# Altium PCB MMA8652FCR1.PcbDoc
Units mm, origin at the board's own origin, x right, y up, seen from the top; angles counter-clockwise.
Board outline 42.93 x 21.46 mm, 2 copper layers (Top Layer, Bottom Layer); 9 components, 8 nets, 29 pads, 0 vias.
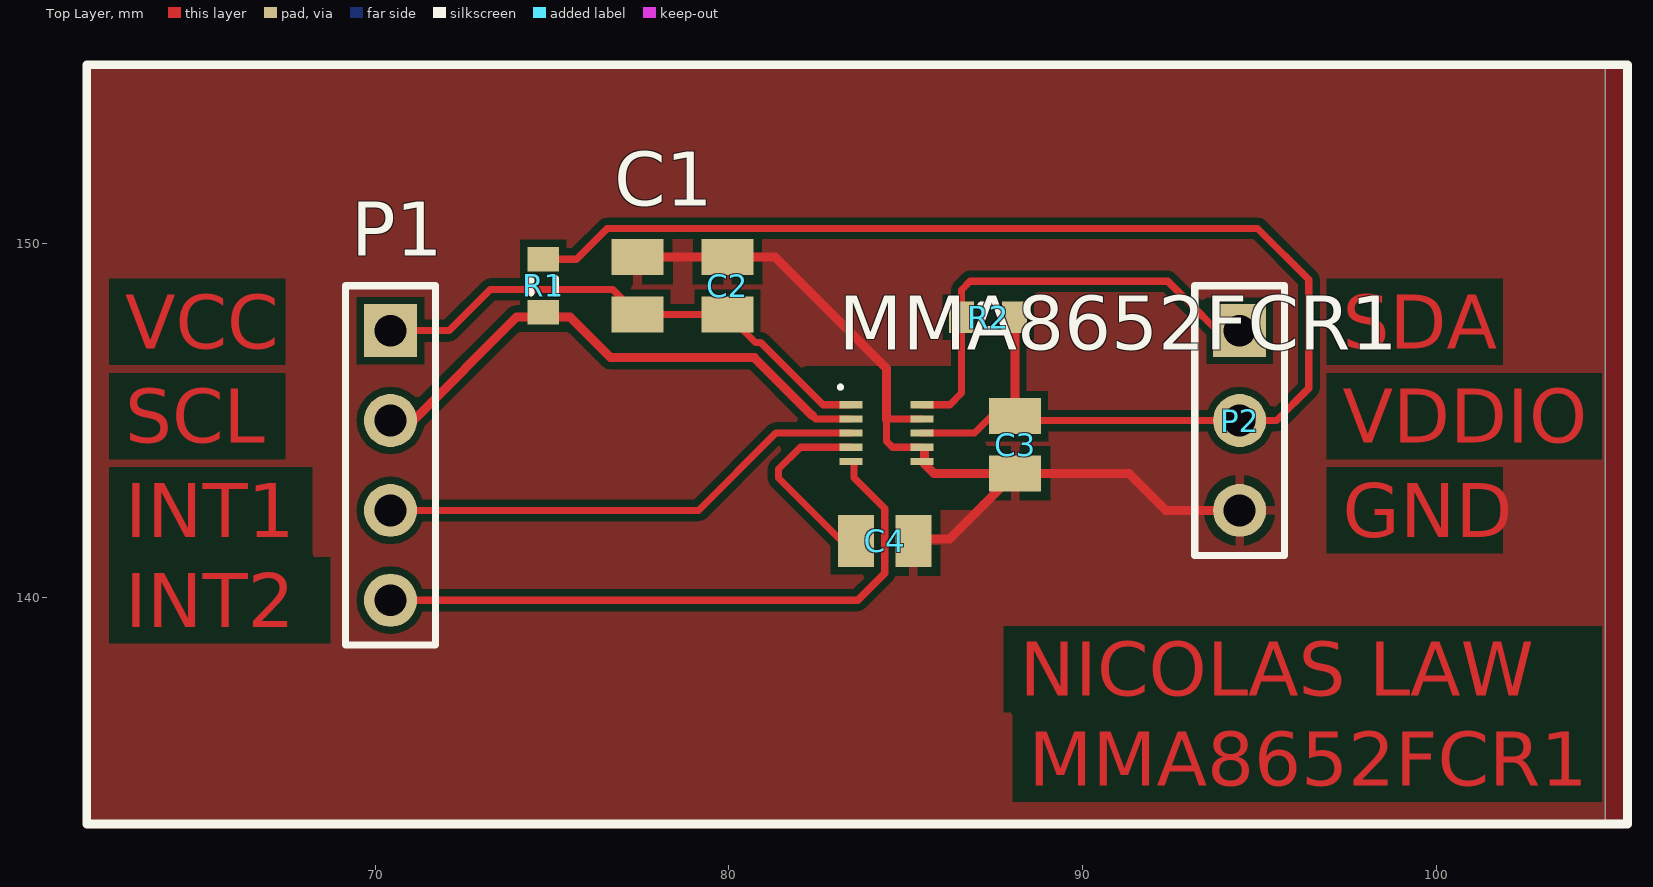
[diagram p0: Top Layer view]
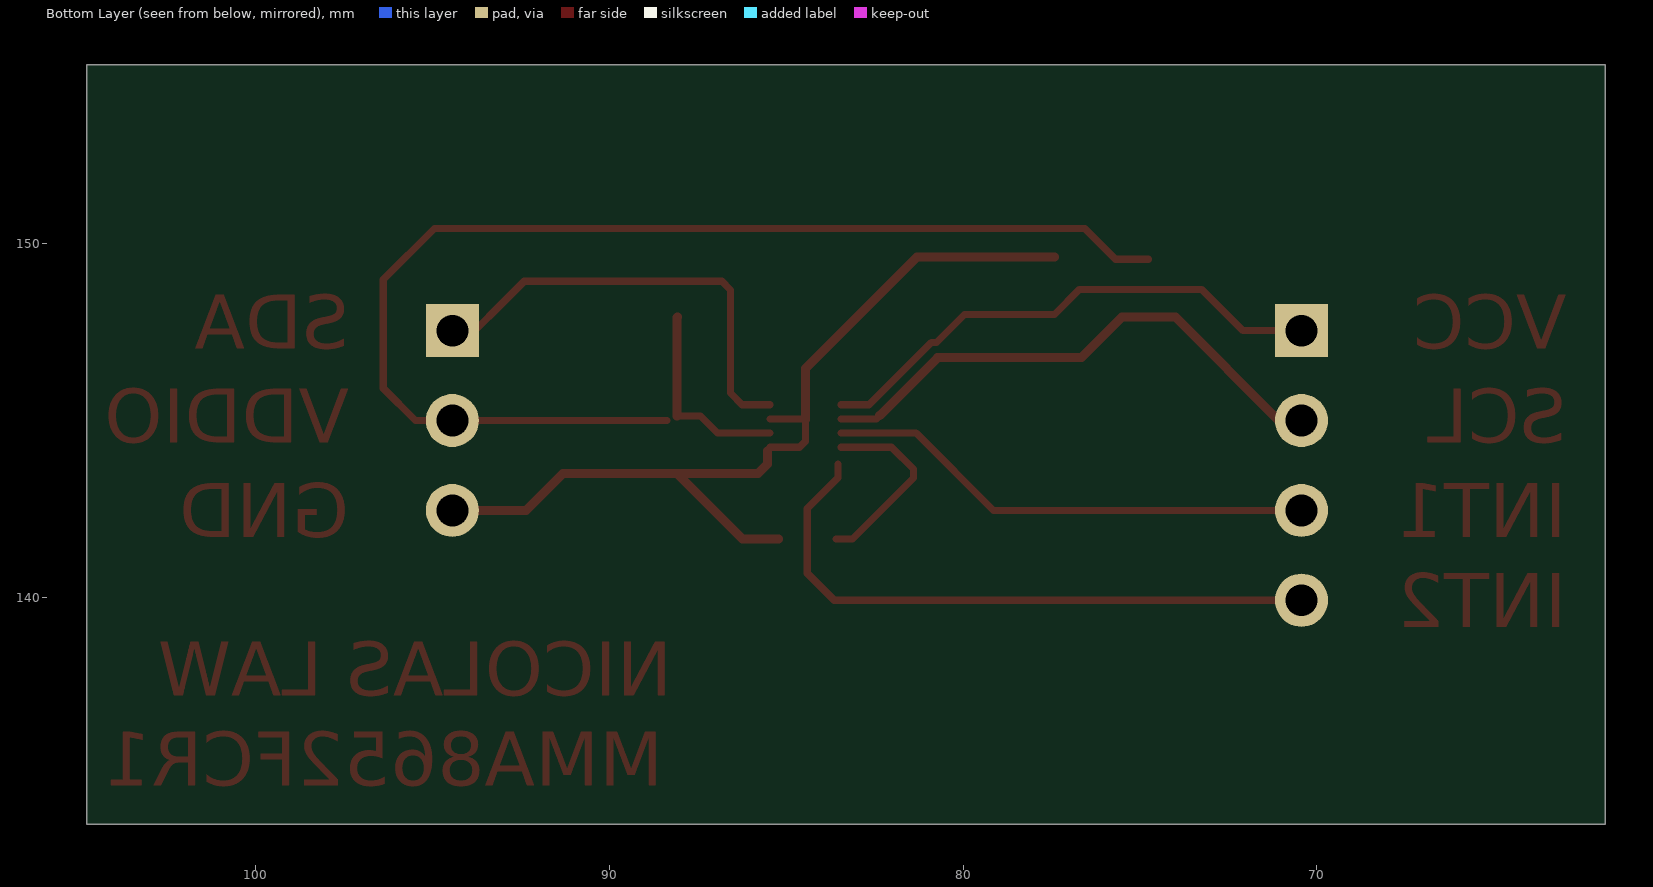
[diagram p1: Bottom Layer view, seen from below]

## Layer stack, top to bottom
Top Solder: solder mask 0.0102, Solder Resist, Dk 3.5
Top Layer: signal copper 0.0356
Dielectric 1: dielectric 0.32, FR-4, Dk 4.8
Bottom Layer: signal copper 0.0356
Bottom Solder: solder mask 0.0102, Solder Resist, Dk 3.5

## Board outline
61.849,133.604 61.849,155.067 104.775,155.067 104.775,133.604

## Design rules (kind name [scope] priority, off if disabled: settings)
Clearance Clearance_1 [All] p1: gap=0.2
Clearance Clearance_plan [InPolygon] p2: gap=0.2
PolygonConnect [All] p1: connectstyle=Relief reliefconductorwidth=0.254 reliefentries=4 polygonreliefangle="90 Angle" airgapwidth=0.254
RoutingVias [All] p1: holewidth=0.6 width=1 viastyle="Through Hole" minholewidth=0.711 minwidth=1.27 maxholewidth=0.711 maxwidth=1.27
SolderMaskExpansion [All] p1: expansion=0.102
UnpouredPolygon [All] p1: allowunpoured=FALSE
Width [All] p1: maxlimit=5 minlimit=0.2 preferedwidth=0.3 minimp=50.000000 maximp=50.000000 favimp=50.000000
29 further rules are at their usual default settings.

## Components (designator, comment, footprint, x,y, rotation, side; value= is the part's Value field where it differs from the comment)
C1 "Cap" capacitor_10uf 77.422,148.819 r270 top
C2 "Cap" capacitor_10uf 79.962,148.819 r270 top
C3 "Cap" Capacitor_100nf 88.09,144.326 r90 top
C4 "Cap" capacitor_10uf 84.407,141.605 r180 top
MMA8652FCR1 "MMA8652FCR1" MMA8652FCR1 84.455,144.655 r0 top
P1 "Header 4" HDR1X4 70.437,147.549 r270 top
P2 "Header 3" HDR1X3 94.44,147.549 r270 top
R1 "Res3" J1-0603 74.755,148.819 r90 top
R2 "Res3" J1-0603 87.328,147.93 r0 top

## Footprints (in the part's own frame and the unit in brackets; to place one, negate y for a bottom-side part, rotate by r counter-clockwise, add the part's x,y. Pads: shape width x height; smd on the part's side, far side on the other; paste and mask are expansions set on the pad)
capacitor_10uf [mm]
  rect 1.02x1.47 smd: 1(-0.81,0) 2(0.81,0)
Capacitor_100nf [mm]
  rect 1.02x1.47 smd: 1(-0.81,0) 2(0.81,0)
HDR1X3 [mm] "Connector; Header; 3 Position"
  rect 1.5x1.5 hole 0.9: 1(0,0)
  round 1.5 hole 0.9: 2(2.54,0) 3(5.08,0)
  silkscreen extent -1.27,-1.27 6.35,1.27
HDR1X4 [mm] "Connector; Header; 4 Position"
  rect 1.5x1.5 hole 0.9: 1(0,0)
  round 1.5 hole 0.9: 2(2.54,0) 3(5.08,0) 4(7.62,0)
  silkscreen extent -1.27,-1.27 8.89,1.27
J1-0603 [mm] "Chip Resistor, Body 1.6x0.8mm, IPC High Density"
  rect 0.7x0.9 smd: 1(-0.75,0) 2(0.75,0)
  silkscreen extent -0.2,-0.35 0.2,0.35, body extent -0.85,-0.48 0.85,0.48, height 0.9
MMA8652FCR1 [mm] "QFN, 10-Leads, Body 2,00x2,00mm, Pitch 0,40mm, Thermal Pad 0,00x0,93mm, IPC Medium Density"
  rect 0.65x0.2 smd: 1(-1,0.8) 2(-1,0.4) 3(-1,0) 4(-1,-0.4) 5(-1,-0.8) 6(1,-0.8) 7(1,-0.4) 8(1,0) 9(1,0.4) 10(1,0.8)
  silkscreen extent -1.35,1.25 -1.25,1.35, body extent -1,-1 1,1, height 1

## Part data
C1 C2 C3 C4: "Capacitor"
P1: "Header, 4-Pin"
P2: "Header, 3-Pin"
R1 R2: "Resistor"

## Nets (pads, with @x,y where several pads share a name; then routed paths per layer and width w, separated by ;. In a path a pad name is that pad's centre, name@x,y a point inside that pad or via, vN(x,y) a via of type N, cw(c..) or ccw(c..) an arc to the next point about the centre after c; other vN are vias at no path point)
BYP: C4.2 MMA8652FCR1.4 | length 5.5
  Top Layer w0.2: MMA8652FCR1.4 82.025,144.255 81.407,143.637 81.407,143.383 83.131,141.659 C4.2@83.597,141.659
GND: C1.1 C2.1 C3.1 C4.1 MMA8652FCR1.6 MMA8652FCR1.7 MMA8652FCR1.9 P2.3 | length 25.9
  Top Layer w0.2: MMA8652FCR1.7 84.625,144.255 84.455,144.424 84.455,145.034 84.476,145.055 MMA8652FCR1.9
  Top Layer w0.254: C1.1 C2.1 81.311,149.629 84.455,146.485 84.455,145.034 ; C4.1@85.217,141.659 86.233,141.659 C3.1 ; 85.534,144.153 85.534,143.78 85.798,143.516 C3.1 ; P2.3 92.354,142.469 91.307,143.516 C3.1
INT1: MMA8652FCR1.3 P1.3 | length 13.9
  Top Layer w0.2: P1.3 79.142,142.469 81.328,144.655 MMA8652FCR1.3
INT2: MMA8652FCR1.5 P1.4 | length 17.7
  Top Layer w0.2: P1.4 83.645,139.929 84.407,140.691 84.407,142.519 83.534,143.392 MMA8652FCR1.5@83.534,143.78
SCL: MMA8652FCR1.2 P1.2 R1.1 | length 15.4
  Top Layer w0.2: 82.363,145.148 82.457,145.055 MMA8652FCR1.2
  Top Layer w0.254: P1.2 71.072,145.009 73.993,147.93 75.517,147.93 76.66,146.787 80.724,146.787 82.363,145.148
SDA: MMA8652FCR1.10 P2.1 R2.1 | length 13
  Top Layer w0.2: MMA8652FCR1.10 86.249,145.455 86.578,145.783 R2.1 86.578,148.704 86.82,148.946 92.408,148.946 P2.1@94.44,146.914
VCC: C1.2 C2.2 MMA8652FCR1.1 P1.1 | length 14.9
  Top Layer w0.2: P1.1 72.088,147.549 73.258,148.719 76.712,148.719 C1.2 C2.2 80.757,147.214 80.901,147.214 82.66,145.455 82.666,145.455 MMA8652FCR1.1
VDDIO: C3.2 MMA8652FCR1.8 P2.2 R1.2 R2.2 | length 39.7
  Top Layer w0.2: R1.2 75.693,149.569 76.563,150.439 94.948,150.439 96.393,148.994 96.393,145.923 95.479,145.009 P2.2 C3.2@88.369,145.009 ; MMA8652FCR1.8 86.945,144.655 87.427,145.136 C3.2
  Top Layer w0.254: R2.2 88.09,147.918 C3.2

## Polygon pours and split planes (outlines as drawn)
GND on Top Layer "Top Layer-No Net" (solid, remove dead copper, pour order 3): 61.829,154.94 61.829,133.477 105.263,133.477 105.263,154.432 105.263,154.94 104.628,155.067 104.501,154.94

## Keep-outs
Keep-Out Layer:
  lines w0.3: 52.1,77.5 52.1,176.5 176.5,176.5 176.5,77.5 52.1,77.5

## Other copper
Top Layer:
  pour cut-out: 81.082,146.271 85.908,146.271 85.981,146.199 85.981,142.207 81.209,142.207 81.082,142.334
  text "VCC" at 62.944,147.041 h1.52
  text "SDA" at 97.361,147.041 h1.52
  text "SCL" at 62.944,144.374 h1.52
  text "VDDIO" at 97.361,144.374 h1.52
  text "INT1" at 62.944,141.707 h1.52
  text "GND" at 97.361,141.707 h1.52
  text "INT2" at 62.944,139.167 h1.52
  text "NICOLAS LAW" at 88.22,137.223 h1.52
  text "MMA8652FCR1" at 88.474,134.683 h1.52

## Silkscreen, mask and mechanical layers (free items; w line width, h text height)
Top Overlay:
  lines w0.254: 61.849,133.604 61.849,155.067 105.41,155.067 105.41,133.604 61.849,133.604

## Dimensions
52.1,77.5 to 52.1,176.5 on Mechanical 1
52.1,77.5 to 176.5,77.5 on Mechanical 1